# Altium PCB haptic_ring_prototype.PcbDoc
Units mil, origin at the board's own origin, x right, y up, seen from the top; angles counter-clockwise.
Board outline 745 x 805 mil, 2 copper layers (Top Layer, Bottom Layer); 12 components, 16 nets, 106 pads, 13 vias.
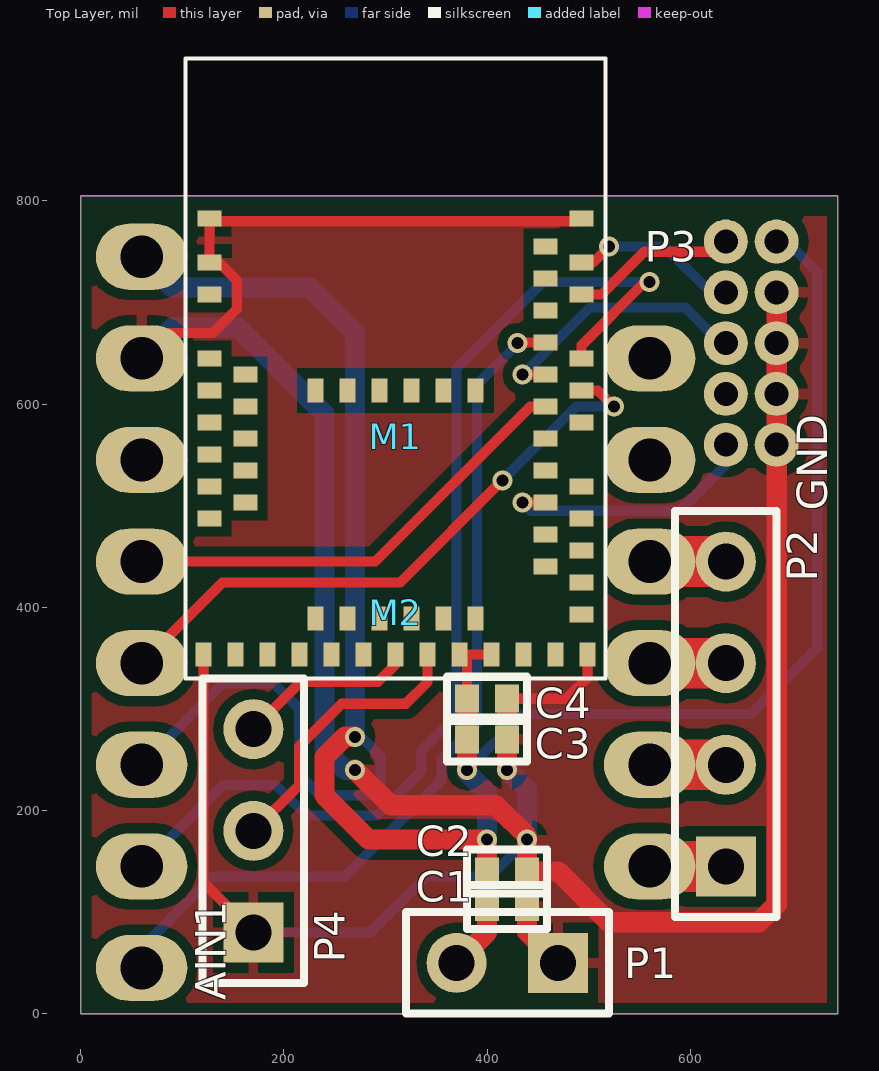
[diagram p0: Top Layer view]
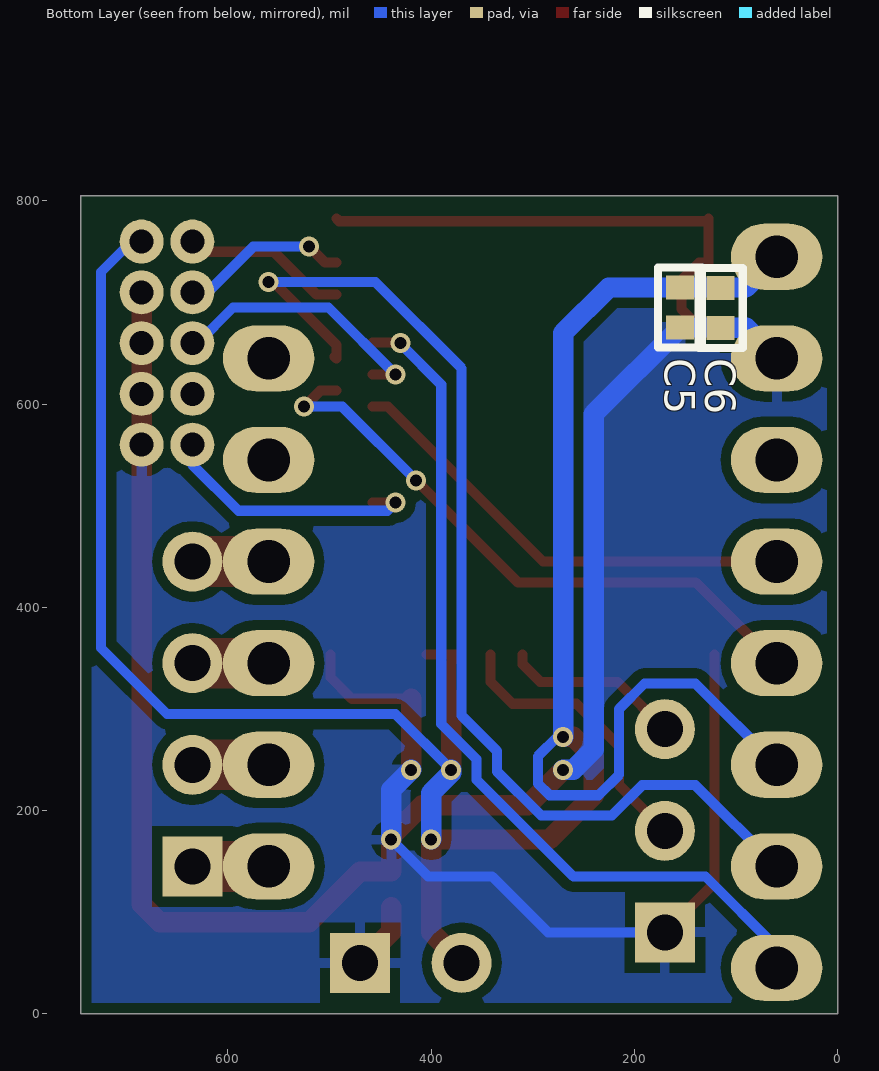
[diagram p1: Bottom Layer view, seen from below]
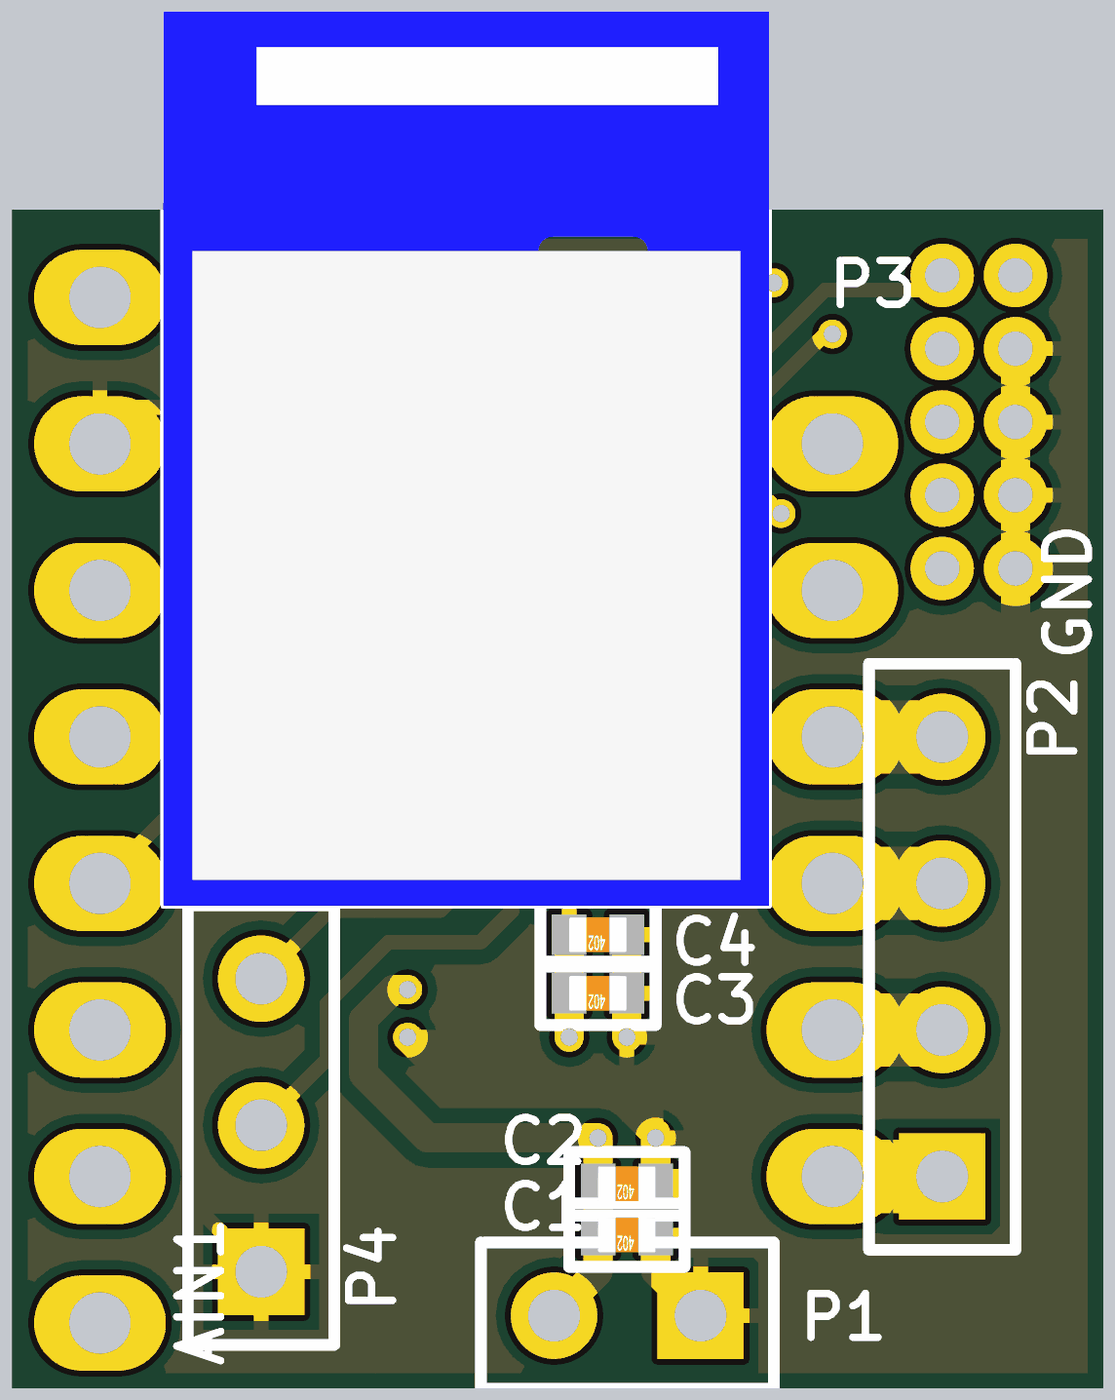
[diagram p2: 3D render of the assembled board from above, using the file's embedded part models]

## Layer stack, top to bottom
Top Solder: solder mask 0.4, Solder Resist, Dk 3.5
Top Layer: signal copper 1.4
Dielectric 1: dielectric 12.6, FR-4, Dk 4.8
Bottom Layer: signal copper 1.4
Bottom Solder: solder mask 0.4, Solder Resist, Dk 3.5

## Board outline
0,0 0,805 745,805 745,0

## Design rules (kind name [scope] priority, off if disabled: settings)
Clearance [All] p1: gap=10 ignorepadtopadclearanceinfootprint=TRUE except(0: Arc-Text Track-Text SMDPad-Text THPad-Text Via-Text Fill-Text Poly-Text Region-Text Text-Text; 5: SMDPad-THPad)
ComponentClearance [All] p1: gap=0 collisioncheckmode=3 verticalgap=0 showdistances=FALSE
PolygonConnect [All] p1: connectstyle=Relief reliefconductorwidth=10 reliefentries=4 polygonreliefangle="90 Angle" airgapwidth=10
RoutingVias [All] p1: holewidth=28 width=50 viastyle="Through Hole" minholewidth=10 minwidth=15 maxholewidth=28 maxwidth=50
SolderMaskExpansion [All] p1: expansion=4
Width [All] p1: maxlimit=50 minlimit=10 preferedwidth=10
29 further rules are at their usual default settings.

## Components (designator, comment, footprint, x,y, rotation, side; value= is the part's Value field where it differs from the comment)
C1 "Cap Semi" C_0402 419.69,105 r180 top value=10uF
C2 "Cap Semi" C_0402 419.69,140 r180 top value=10uF
C3 "Cap Semi" C_0402 400,270 r180 top value=10uF
C4 "Cap Semi" C_0402 400,310 r180 top value=10uF
C5 "Cap Semi" C_0402 155,695 r90 bottom value=10uF
C6 "Cap Semi" C_0402 115,694.68 r90 bottom value=10uF
M1 "MDBT50Q-1MV2" MDBT50Q-1MV2 310,940 r0 top
M2 "DRV8833 Motor Driver Breakout Board Adafruit" "DRV8833 DC/Stepper Motor Driver Breakout Board Adafruit" 310,395 r90 top
P1 "PWR" HDR1X2 470,50 r180 top
P2 "M_OUT" HDR1X4 635,145 r90 top
P3 "SWD" "header male th 1.27 5x2 pins" 660,660 r270 top
P4 "UART" HDR1X3 170,80 r90 top

## Footprints (in the part's own frame and the unit in brackets; to place one, negate y for a bottom-side part, rotate by r counter-clockwise, add the part's x,y. Pads: shape width x height; smd on the part's side, far side on the other; paste and mask are expansions set on the pad)
C_0402 [mm]
  rect 0.6x0.7 smd: 1(-0.5,0) 2(0.5,0)
  silkscreen extent -1,-0.55 1,0.55, body extent -0.5,-0.3 0.5,0.3, height 0.2
"DRV8833 DC/Stepper Motor Driver Breakout Board Adafruit" [mil]
  oval 65x90 hole 42: 1(-350,250) 2(-250,250) 3(-150,250) 4(-50,250) 5(50,250) 6(150,250) 7(250,250) 8(350,250) 9(-250,-250) 10(-150,-250) 11(-50,-250) 12(50,-250) 13(150,-250) 14(250,-250)
HDR1X2 [mm] "Connector; Header; 2 Position"
  rect 1.5x1.5 hole 0.9: 1(0,0)
  round 1.5 hole 0.9: 2(2.54,0)
  silkscreen extent -1.27,-1.27 3.81,1.27
HDR1X3 [mm] "Connector; Header; 3 Position"
  rect 1.5x1.5 hole 0.9: 1(0,0)
  round 1.5 hole 0.9: 2(2.54,0) 3(5.08,0)
  silkscreen extent -1.27,-1.27 6.35,1.27
HDR1X4 [mm] "Connector; Header; 4 Position"
  rect 1.5x1.5 hole 0.9: 1(0,0)
  round 1.5 hole 0.9: 2(2.54,0) 3(5.08,0) 4(7.62,0)
  silkscreen extent -1.27,-1.27 8.89,1.27
"header male th 1.27 5x2 pins" [mm]
  round 1.1 hole 0.6: 1(-2.54,-0.635) 2(-2.54,0.635) 3(-1.27,-0.635) 4(-1.27,0.635) 5(0,-0.635) 6(0,0.635) 7(1.27,-0.635) 8(1.27,0.635) 9(2.54,-0.635) 10(2.54,0.635)
MDBT50Q-1MV2 [mm] "Raytac MDBT50Q-1MV2 deployed Chip Antenna and offers a excellent connectivity ability."
  rect 0.6x0.4 smd mask+0.05: 1(-4.65,-4) 2(-4.65,-5.1) 3(-4.65,-5.9) 4(-4.65,-7.5) 5(-3.75,-7.9) 6(-4.65,-8.3) 7(-3.75,-8.7) 8(-4.65,-9.1) 9(-3.75,-9.5) 10(-4.65,-9.9) 11(-3.75,-10.3) 12(-4.65,-10.7) 13(-3.75,-11.1) 14(-4.65,-11.5) 34(4.65,-13.9) 35(4.65,-13.1) 36(3.75,-12.7) 37(4.65,-12.3) 38(3.75,-11.9) 39(4.65,-11.5) 40(3.75,-11.1) 41(4.65,-10.7) 42(3.75,-10.3) 43(3.75,-9.5) 44(4.65,-9.1) 45(3.75,-8.7) 46(4.65,-8.3) 47(3.75,-7.9) 48(4.65,-7.5) 49(3.75,-7.1) 50(3.75,-6.3) 51(4.65,-5.9) 52(3.75,-5.5) 53(4.65,-5.1) 54(3.75,-4.7) 55(4.65,-4)
  rect 0.4x0.6 smd mask+0.05: 15(-4.8,-14.9) 16(-4,-14.9) 17(-3.2,-14.9) 18(-2.4,-14.9) 19(-2,-14) 20(-1.6,-14.9) 21(-1.2,-14) 22(-0.8,-14.9) 23(-0.4,-14) 24(0,-14.9) 25(0.4,-14) 26(0.8,-14.9) 27(1.2,-14) 28(1.6,-14.9) 29(2,-14) 30(2.4,-14.9) 31(3.2,-14.9) 32(4,-14.9) 33(4.8,-14.9) 56(-2,-8.3) 57(-1.2,-8.3) 58(-0.4,-8.3) 59(0.4,-8.3) 60(1.2,-8.3) 61(2,-8.3)
  silkscreen extent -5.25,-15.5 5.25,0, body extent -5.25,-15.5 5.25,0, height 2.05

## Part data
C1 C2 C3 C4 C5 C6: "Capacitor (Semiconductor SIM Model)", LatestRevisionDate=29-May-2009, LatestRevisionNote="IPC-7351 Footprint Added.", PackageDescription="Chip Capacitor", PackageReference=C1206, Published=8-Jun-2000, Publisher="Altium Limited"
M1: library part MDBT50Q_52840, "MDBT50Q_52840"
M2: library part "DRV8833 DC/Stepper Motor Driver Breakout Board Adafruit"
P1: library part "Header 2", "Header, 2-Pin", LatestRevisionDate=17-Jul-2002, LatestRevisionNote="Re-released for DXP Platform.", Publisher="Altium Limited"
P2: library part "Header 4", "Header, 4-Pin", LatestRevisionDate=17-Jul-2002, LatestRevisionNote="Re-released for DXP Platform.", Publisher="Altium Limited"
P3: library part "Header 5X2", "Header, 5-Pin, Dual row", LatestRevisionDate=17-Jul-2002, LatestRevisionNote="Re-released for DXP Platform.", Publisher="Altium Limited"
P4: library part "Header 3", "Header, 3-Pin", LatestRevisionDate=17-Jul-2002, LatestRevisionNote="Re-released for DXP Platform.", Publisher="Altium Limited"

## Via types
v1: diameter 19.68, hole 11.81, Top Layer to Bottom Layer, 13 vias

## Nets (pads, with @x,y where several pads share a name; then routed paths per layer and width w, separated by ;. In a path a pad name is that pad's centre, name@x,y a point inside that pad or via, vN(x,y) a via of type N, cw(c..) or ccw(c..) an arc to the next point about the centre after c; other vN are vias at no path point)
3.3V: C1.2 C2.2 C3.2 C4.2 C5.2 C6.2 M1.28 M1.30 M2.3 M2.8 P1.2 P3.2 | length 2483.7
  Top Layer w10: C4.2 380.31,346.06 M1.28 M1.30
  Top Layer w20: v1(270,272.57) 260.15,272.57 240,252.43 240,215 283.64,171.36 v1(400,171.36) C2.2 C1.2 400,80 P1.2 ; v1(380.31,240) C3.2 C4.2
  Bottom Layer w10: M2.3 140,325 190,325 215,300 215,235.32 235.31,215 283.43,215 295,226.57 295,253.28 275.71,272.57 v1(270,272.57) ; v1(380.31,240) 435.31,295 660,295 725,360 725,730 695,760 P3.2
  Bottom Layer w20: M2.8 90.31,714.68 C5.2 225.31,714.68 270,670 v1(270,272.57) ; v1(380.31,240) 380.31,236.94 400,217.26 v1(400,171.36)
AIN1: M1.49 M2.1 | length 872.2
  Top Layer w10: v1(430,660) 430.47,660.47 M1.49
  Bottom Layer w10: M2.1 60,65 130,135 260,135 355.31,230.32 355.31,250.36 390,285.04 390,619.11 430,659.11 v1(430,660)
AIN2: M1.48 M2.2 | length 1083.6
  Top Layer w10: M1.48@495,646.65 M1.48 493.07,658.07 555,720 v1(560,720)
  Bottom Layer w10: M2.2 140,225 192.26,225 222.26,195 291.72,195 335.31,238.6 335.31,258.64 370,293.32 370,635.13 454.87,720 v1(560,720)
AOUT1: M2.9 P2.1 | length 85
  Top Layer w20: P2.1 P2.1@645,145
  Top Layer w50: M2.9 P2.1
AOUT2: M2.10 P2.2 | length 85
  Top Layer w20: P2.2 P2.2@645,245
  Top Layer w50: M2.10 P2.2
BIN1: M1.45 M2.5 | length 460.8
  Top Layer w10: M2.5 290,445 442.48,597.48 M1.45
BIN2: M1.46 M2.4 | length 608
  Top Layer w10: M2.4 139.25,424.25 314.25,424.25 v1(415,525) ; M1.46 509.25,613.23 v1(525,597.48)
  Bottom Layer w10: v1(415,525) 487.48,597.48 v1(525,597.48)
BOUT1: M2.12 P2.4 | length 85
  Top Layer w20: P2.4 P2.4@645,445
  Top Layer w50: M2.12 P2.4
BOUT2: M2.11 P2.3 | length 85
  Top Layer w20: P2.3 P2.3@645,345
  Top Layer w50: M2.11 P2.3
GND: C1.1 C2.1 C3.1 C4.1 C5.1 C6.1 M1.1 M1.2 M1.15 M1.33 M1.55 M2.7 P1.1 P3.4 P3.6 P3.8 P3.10 P4.1 | length 3237.9
  Top Layer w10: M2.7 85,670 130.11,670 153.74,693.63 153.74,721.8 136.33,739.21 M1.2 M1.1 129.45,780 490.55,780 M1.55 ; M1.15 121.02,128.98 P4.1 ; C4.1 478.07,310 498.98,330.91 M1.33
  Top Layer w20: v1(270,240) 305,205 408.79,205 439.37,174.42 v1(439.37,171.36) C2.1 470,140 520,90 667.34,90 685,107.66 P3.10 P3.8 P3.6 P3.4 ; v1(419.69,240) C3.1 C4.1 ; C1.1 439.37,80.63 P1.1 P1.1@485,65
  Bottom Layer w10: P4.1 285,80 340,135 403.01,135 v1(439.37,171.36)
  Bottom Layer w20: M2.7 90,675 C6.1 115.31,675.32 C5.1 240,590.32 240,260.15 260.15,240 v1(270,240) ; v1(419.69,240) 439.37,220.32 v1(439.37,171.36)
RESET: M1.40 P3.9 | length 264.4
  Top Layer w10: v1(435,502.99) M1.40
  Bottom Layer w10: v1(435,502.99) 442.99,495 589.69,495 635,540.32 P3.9
RX: M1.26 P4.2 | length 281.4
  Top Layer w10: P4.2 215,225 215,263.06 256.94,305 320,305 341.5,326.5 M1.26
SWDCLK: M1.53 P3.3 | length 167.1
  Top Layer w10: M1.53 504.25,739.21 v1(520,754.96)
  Bottom Layer w10: v1(520,754.96) 575.04,754.96 620,710 P3.3
SWDIO: M1.51 P3.1 | length 163.7
  Top Layer w10: M1.51 512.72,707.72 535.16,730.16 535.16,730.29 554.87,750 625,750 P3.1
SWO: M1.47 P3.5 | length 264.5
  Top Layer w10: v1(435,628.98) M1.47
  Bottom Layer w10: v1(435,628.98) 501.02,695 595,695 630,660 P3.5
TX: M1.24 P4.3 | length 175.9
  Top Layer w10: P4.3 216.57,326.57 292.59,326.57 310,343.98 M1.24
pads on no net: M1.3 M1.4 M1.5 M1.6 M1.7 M1.8 M1.9 M1.10 M1.11 M1.12 M1.13 M1.14 M1.16 M1.17 M1.18 M1.19 M1.20 M1.21 M1.22 M1.23 M1.25 M1.27 M1.29 M1.31 M1.32 M1.34 M1.35 M1.36 M1.37 M1.38 M1.39 M1.41 M1.42 M1.43 M1.44 M1.50 M1.52 M1.54 M1.56 M1.57 M1.58 M1.59 M1.60 M1.61 M2.6 M2.13 M2.14 P3.7

## Polygon pours and split planes (outlines as drawn)
GND on Bottom Layer "GND_L02_P002" (solid, remove dead copper, pour order 2): 0,785 745,785 745,0 0,0
no net on Bottom Layer "GND_FET_MID1" (solid, remove dead copper, pour order 0): 10,780
GND on Top Layer "GND_FET_MID1" (solid, remove dead copper, pour order 4): 745,785 0,785 0,0 745,0

## Keep-outs
Keep-Out Layer:
  the board outline again, w1

## Silkscreen, mask and mechanical layers (free items; w line width, h text height)
Top Overlay:
  text "GND" at 735,495 h30 r90

## Text inside footprints (layer, text, board x,y; h text height)
M1: Mechanical 2 "as wide as possible" at 165,970 h21.65; Mechanical 2 "No ground pad" at 199.71,870.12 h17.72; Mechanical 3 "Toplayer no ground pad" at 176.14,694.92 h11.81
M2: Top Overlay "AIN1" at 142.68,13.11 h30 r90